# EAGLE board MRCS-Buckeroo V1_6-array (EAGLE 7.7.0)
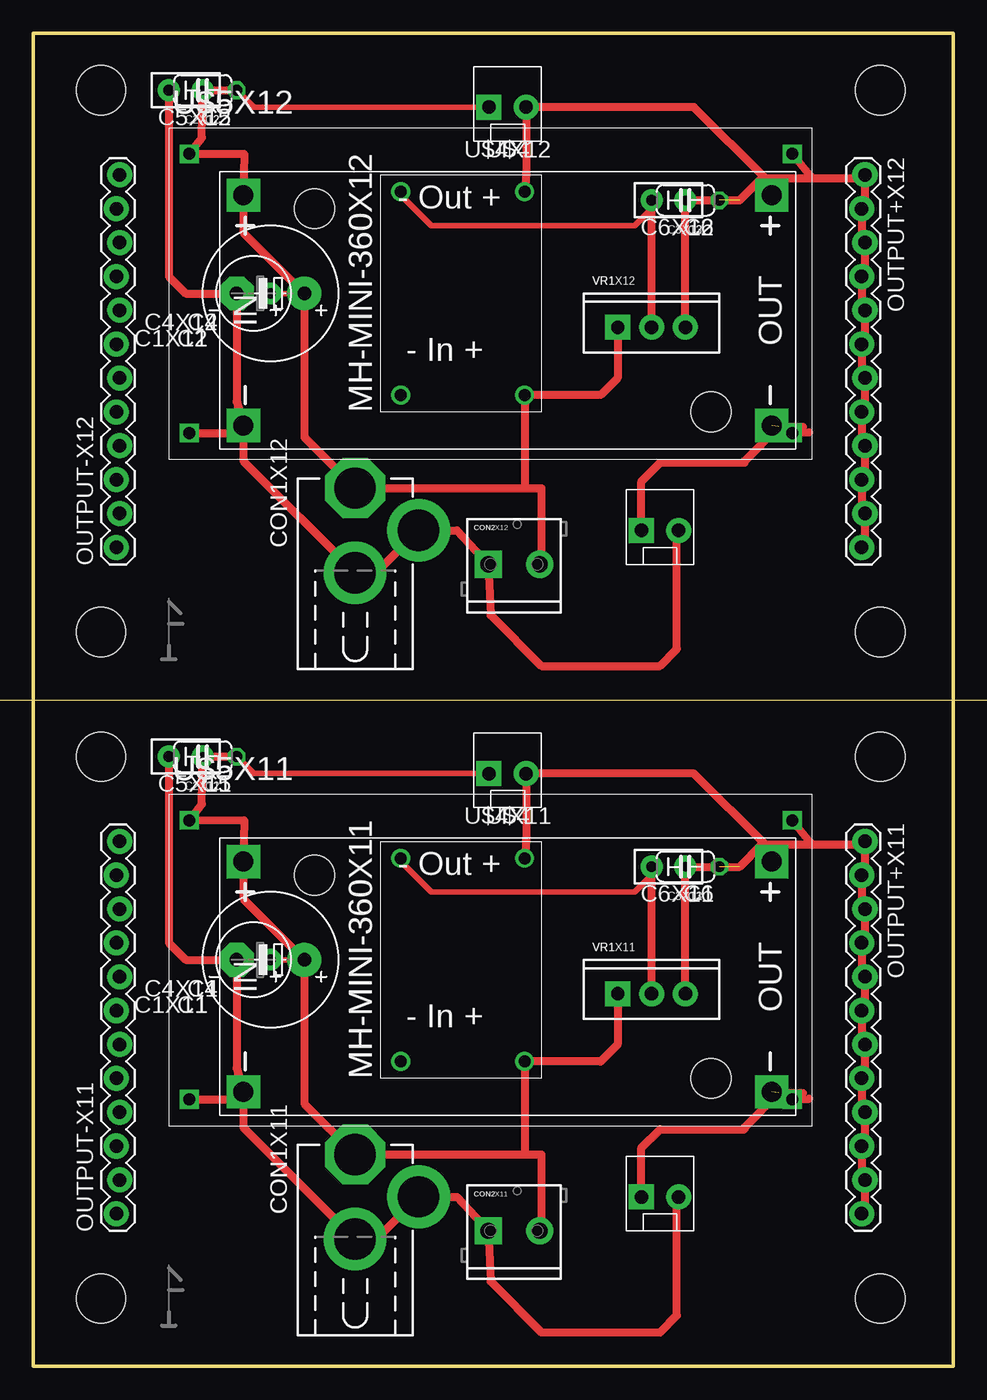
[diagram p0: board, top side]
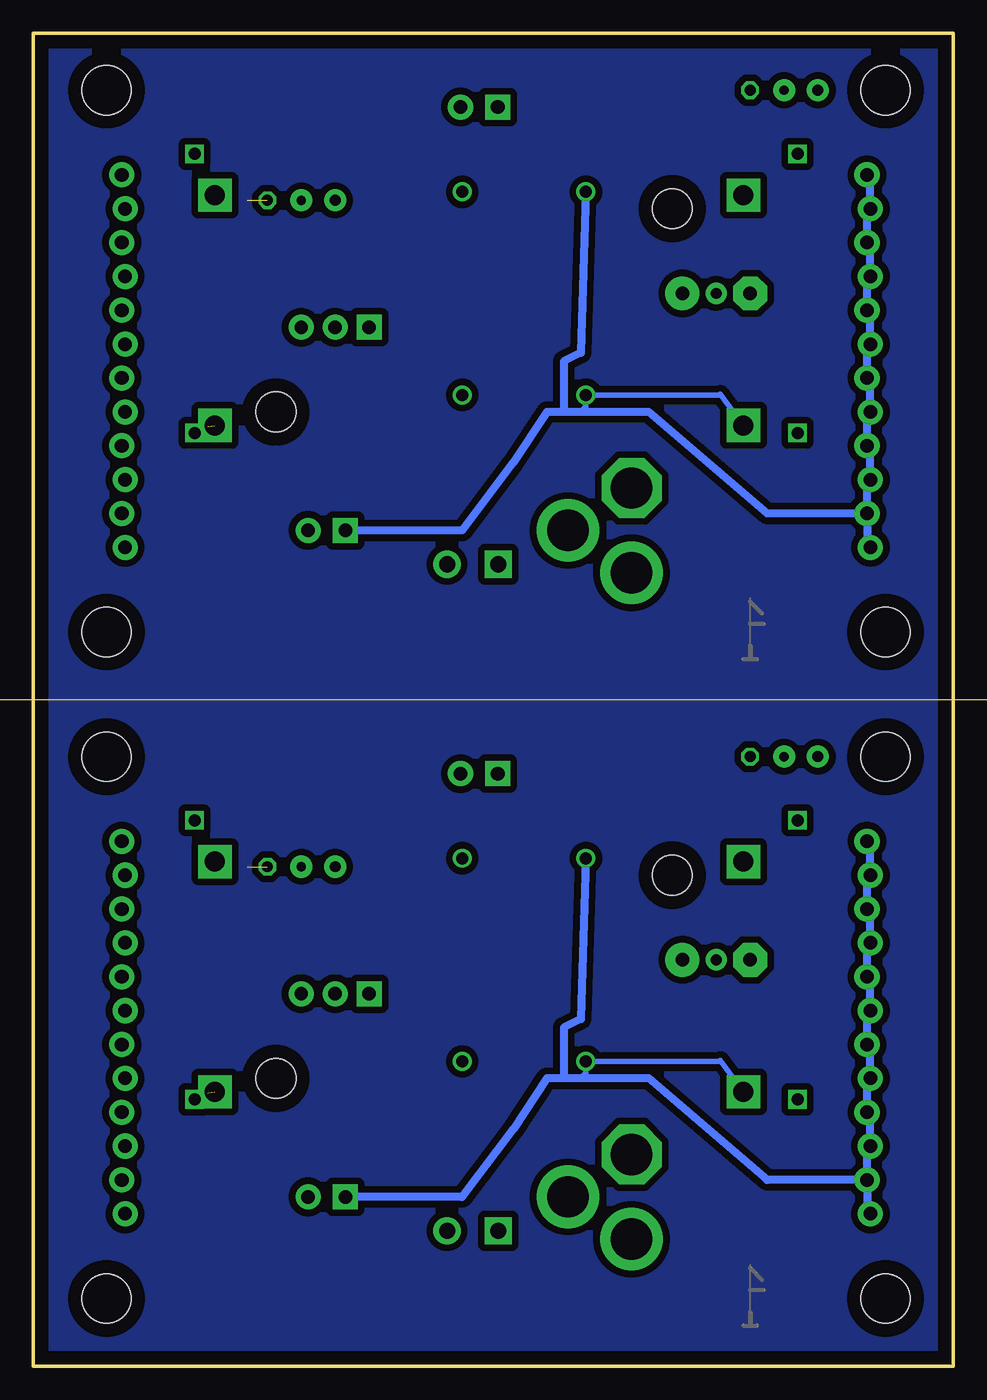
[diagram p1: board, bottom side, seen from below]

Size 68.99 x 99.97 mm. Coordinates in mm from the lower left corner, seen from the top.
Outline: 0,0 68.99,0 68.99,99.97 0,99.97 0,0
Copper layers (1*16): Top 0.035mm / dielectric 1.5mm / Bottom 0.035mm
Design rules "default": minimum track width 10mil, minimum drill 24mil, track to track 8mil, track to pad 8mil, pad to pad 8mil, via to via 8mil, smd to smd 8mil, copper to edge 40mil, drill to drill 8mil, minimum pad ring 10mil, minimum via ring 8mil, stop-mask expansion 4mil, vias tented up to drill 0mil, thermal gap 10mil
Holes 3.7 mm at 5.08,5.08 5.08,45.72 63.5,45.72 63.5,5.08 5.08,55.07 5.08,95.71 63.5,95.71 63.5,55.07
Milling: 1 lines

## Footprints (pad centres in the part's own frame; a part is rotated, then mirrored left to right if it is on the bottom)
E5-10.5 = drill 1.016 pad 2.54: + -2.54,0 | drill 1.016 pad 2.54 octagon: - 2.54,0
C-PTH-0.100 = drill 0.7 pad 1.651: 1 -1.27,0; 2 1.27,0
E2.5-6 = drill 0.813 pad 1.6: + -1.27,0 | drill 0.813 pad 1.6 octagon: - 1.27,0
C050-024X044 = drill 0.813 octagon: 1 -2.54,0; 2 2.54,0
DCJ0202 = drill 3.1 pad 4.5 octagon: 1 0,3.175 | drill 3.1 pad 4.7: 2 4.763,0; 3 0,-3.175
SCREWTERMINAL-3.5MM-2_LOCK = drill 1.2 pad 2.032 square: 1 -0.178,0 | drill 1.2 pad 2.032: 2 3.678,0
MOLEX-1X2_LOCK = drill 1.016 pad 1.88 square: 1 -0.127,0 | drill 1.016 pad 1.88: 2 2.667,0
MH-MINI-360 = drill 0.9: IN- -7.62,4.826; INN+ -7.62,-4.445; OUT- 7.62,4.826; OUTT+ 7.62,-4.445
1X12_LOCK = drill 1.016 pad 1.88: 1 0,0.127; 2 2.54,-0.127; 3 5.08,0.127; 4 7.62,-0.127; 5 10.16,0.127; 6 12.7,-0.127; 7 15.24,0.127; 8 17.78,-0.127; 9 20.32,0.127; 10 22.86,-0.127; 11 25.4,0.127; 12 27.94,-0.127
DC-DC-STEP-DOWN-LM2596 = drill 1.5 pad 2.5 square: IN+ -19.812,8.636; IN- -19.812,-8.636; OUT+ 19.812,8.636; OUT- 19.812,-8.636 | hole 3: -14.478,7.62; 15.24,-7.62
XL6009_BOARD = drill 0.9 square: IN+ -22.606,10.465; IN- -22.606,-10.465; OUT+ 22.606,10.465; OUT- 22.606,-10.465
TO-220-RA = drill 1 pad 1.88: GND 0,0; OUT 2.54,0 | drill 1 pad 1.88 square: IN -2.54,0

## Placement (x,y rotation side)
C1X11  150uF@50  [E5-10.5]  17.78,30.48 180 top
C1X12  150uF@50  [E5-10.5]  17.78,80.47 180 top
C2X11  1.0uF@50  [C-PTH-0.100]  11.43,45.72 180 top
C2X12  1.0uF@50  [C-PTH-0.100]  11.43,95.71 180 top
C3X11  10uF@50  [C-PTH-0.100]  47.62,37.47 180 top
C3X12  10uF@50  [C-PTH-0.100]  47.62,87.45 180 top
C4X11  220uF @ 35V  [E2.5-6]  16.51,30.48 180 top
C4X12  220uF @ 35V  [E2.5-6]  16.51,80.47 180 top
C5X11  1.0 UF@ 50V  [C050-024X044]  12.7,45.72 180 top
C5X12  1.0 UF@ 50V  [C050-024X044]  12.7,95.71 180 top
C6X11  10uF @ 50V  [C050-024X044]  48.9,37.47 180 top
C6X12  10uF @ 50V  [C050-024X044]  48.9,87.45 180 top
CON1X11  DC PWR  [DCJ0202]  24.13,12.7 0 top
CON1X12  DC PWR  [DCJ0202]  24.13,62.69 0 top
CON2X11  DC PWR  [SCREWTERMINAL-3.5MM-2_LOCK]  34.29,10.16 0 top
CON2X12  DC PWR  [SCREWTERMINAL-3.5MM-2_LOCK]  34.29,60.15 0 top
CON3X11  output bypass  [MOLEX-1X2_LOCK]  34.29,44.45 0 top
CON3X12  output bypass  [MOLEX-1X2_LOCK]  34.29,94.44 0 top
CON4X11  GND BYPASS  [MOLEX-1X2_LOCK]  45.72,12.7 0 top
CON4X12  GND BYPASS  [MOLEX-1X2_LOCK]  45.72,62.69 0 top
MH-MINI-360X11  MH-MINI-360  [MH-MINI-360]  32.38,30.48 90 top
MH-MINI-360X12  MH-MINI-360  [MH-MINI-360]  32.38,80.47 90 top
OUTPUT+X11  OUTPUT+  [1X12_LOCK]  62.23,39.37 270 top
OUTPUT+X12  OUTPUT+  [1X12_LOCK]  62.23,89.36 270 top
OUTPUT-X11  OUTPUT-  [1X12_LOCK]  6.35,11.43 90 top
OUTPUT-X12  OUTPUT-  [1X12_LOCK]  6.35,61.42 90 top
U$1X11  [CA-PROP65WARNING]  40.64,35.56 0 top
U$1X12  [CA-PROP65WARNING]  40.64,85.55 0 top
U$2X11  [MRCSLOGOTOP]  8.89,2.54 0 top
U$2X12  [MRCSLOGOTOP]  8.89,52.53 0 top
U$3X11  [MRCSLOGOBTM]  8.89,2.54 0 top
U$3X12  [MRCSLOGOBTM]  8.89,52.53 0 top
U$4X11  DC-DC-STEP-DOWN-LM2596  [DC-DC-STEP-DOWN-LM2596]  35.56,29.21 0 top
U$4X12  DC-DC-STEP-DOWN-LM2596  [DC-DC-STEP-DOWN-LM2596]  35.56,79.2 0 top
U$5X11  XL6009BOARD  [XL6009_BOARD]  34.29,30.48 0 top
U$5X12  XL6009BOARD  [XL6009_BOARD]  34.29,80.47 0 top
VR1X11  780X  [TO-220-RA]  46.35,27.94 0 top
VR1X12  780X  [TO-220-RA]  46.35,77.93 0 top

## Library data of the parts
C1X11 C1X12 C2X11 C2X12 C3X11 C3X12 C4X11 C4X12 C5X11 C5X12 C6X11 C6X12 CON1X11 CON1X12 CON2X11 CON2X12 CON3X11 CON3X12 CON4X11 CON4X12 OUTPUT+X11 OUTPUT+X12 OUTPUT-X11 OUTPUT-X12 VR1X11 VR1X12 = SPCoast
MH-MINI-360X11 MH-MINI-360X12 U$5X11 U$5X12 = MRCS
U$1X11 U$1X12 = MRCS-prop65warningBtm
U$2X11 U$2X12 = MRCSLogoTop
U$3X11 U$3X12 = MRCSLogoBtm
U$4X11 U$4X12 = diy-modules

## Nets
GNDX11: C1X11.- C2X11.2 C3X11.2 C4X11.- C5X11.2 C6X11.2 CON1X11.2 CON1X11.3 CON2X11.1 CON4X11.1 CON4X11.2 MH-MINI-360X11.IN- MH-MINI-360X11.OUT- OUTPUT-X11.1 OUTPUT-X11.2 OUTPUT-X11.3 OUTPUT-X11.4 OUTPUT-X11.5 OUTPUT-X11.6 OUTPUT-X11.7 OUTPUT-X11.8 OUTPUT-X11.9 OUTPUT-X11.10 OUTPUT-X11.11 OUTPUT-X11.12 U$4X11.IN- U$4X11.OUT- U$5X11.IN- U$5X11.OUT- VR1X11.GND
GNDX12: C1X12.- C2X12.2 C3X12.2 C4X12.- C5X12.2 C6X12.2 CON1X12.2 CON1X12.3 CON2X12.1 CON4X12.1 CON4X12.2 MH-MINI-360X12.IN- MH-MINI-360X12.OUT- OUTPUT-X12.1 OUTPUT-X12.2 OUTPUT-X12.3 OUTPUT-X12.4 OUTPUT-X12.5 OUTPUT-X12.6 OUTPUT-X12.7 OUTPUT-X12.8 OUTPUT-X12.9 OUTPUT-X12.10 OUTPUT-X12.11 OUTPUT-X12.12 U$4X12.IN- U$4X12.OUT- U$5X12.IN- U$5X12.OUT- VR1X12.GND
INPUT+X11: C1X11.+ C2X11.1 C4X11.+ C5X11.1 CON1X11.1 CON2X11.2 CON3X11.1 MH-MINI-360X11.INN+ U$4X11.IN+ U$5X11.IN+ VR1X11.IN
INPUT+X12: C1X12.+ C2X12.1 C4X12.+ C5X12.1 CON1X12.1 CON2X12.2 CON3X12.1 MH-MINI-360X12.INN+ U$4X12.IN+ U$5X12.IN+ VR1X12.IN
OUTPUT+X11: C3X11.1 C6X11.1 CON3X11.2 MH-MINI-360X11.OUTT+ OUTPUT+X11.1 OUTPUT+X11.2 OUTPUT+X11.3 OUTPUT+X11.4 OUTPUT+X11.5 OUTPUT+X11.6 OUTPUT+X11.7 OUTPUT+X11.8 OUTPUT+X11.9 OUTPUT+X11.10 OUTPUT+X11.11 OUTPUT+X11.12 U$4X11.OUT+ U$5X11.OUT+ VR1X11.OUT
OUTPUT+X12: C3X12.1 C6X12.1 CON3X12.2 MH-MINI-360X12.OUTT+ OUTPUT+X12.1 OUTPUT+X12.2 OUTPUT+X12.3 OUTPUT+X12.4 OUTPUT+X12.5 OUTPUT+X12.6 OUTPUT+X12.7 OUTPUT+X12.8 OUTPUT+X12.9 OUTPUT+X12.10 OUTPUT+X12.11 OUTPUT+X12.12 U$4X12.OUT+ U$5X12.OUT+ VR1X12.OUT

## Tracks (layer width: path | path; a pad name or v marks a point on that pad's centre or on a via)
GNDX11  (1 unrouted)
  Top 0.406: C4X11.- 15.24,21.59 | MH-MINI-360X11.OUT- 27.56,37.85 29.84,35.56 45.09,35.56 46.35,36.83
  Top 0.61: 15.75,20.32 U$4X11.IN- 15.24,22.35 C4X11.- 11.43,30.48 10.16,31.75 C5X11.2 | 15.75,20.32 15.75,17.91 CON1X11.3 25.72,9.53 CON1X11.2 31.75,12.7 CON2X11.1 34.29,6.35 38.1,2.54 46.99,2.54 48.26,3.81 48.26,12.57 CON4X11.2 | U$5X11.IN- 15.44,20.02 15.75,20.32 | CON4X11.1 45.59,16.38 46.99,17.78 53.34,17.78 53.34,17.92 55.91,20.48 57.7,20.48 U$5X11.OUT- 58.17,20.07 | VR1X11.GND 46.35,36.83 C3X11.2
  Bottom 0.406: U$4X11.IN- 17.46,22.92 17.46,22.86 MH-MINI-360X11.IN- 27.56,21.97 27.94,21.59
  Bottom 0.61: OUTPUT-X11.2 13.97,13.97 22.86,21.59 27.94,21.59 29.21,21.59 | 29.21,21.59 30.48,21.59 33.02,17.78 36.83,12.7 CON4X11.1 | MH-MINI-360X11.OUT- 27.94,26.04 29.21,25.4 29.21,21.59 | OUTPUT-X11.2 6.48,11.68 OUTPUT-X11.1 | OUTPUT-X11.2 6.48,16.26 OUTPUT-X11.3 6.22,18.8 OUTPUT-X11.4 6.48,21.34 OUTPUT-X11.5 6.22,23.88 OUTPUT-X11.6 6.48,26.42 OUTPUT-X11.7 6.22,28.96 OUTPUT-X11.8 6.48,31.5 OUTPUT-X11.9 6.22,34.04 OUTPUT-X11.10 6.48,36.58 OUTPUT-X11.11 6.22,39.12 OUTPUT-X11.12
GNDX12  (1 unrouted)
  Top 0.406: C4X12.- 15.24,71.58 | MH-MINI-360X12.OUT- 27.56,87.83 29.84,85.55 45.09,85.55 46.35,86.82
  Top 0.61: 15.75,70.31 U$4X12.IN- 15.24,72.34 C4X12.- 11.43,80.47 10.16,81.74 C5X12.2 | 15.75,70.31 15.75,67.89 CON1X12.3 25.72,59.51 CON1X12.2 31.75,62.69 CON2X12.1 34.29,56.34 38.1,52.53 46.99,52.53 48.26,53.8 48.26,62.56 CON4X12.2 | U$5X12.IN- 15.44,70 15.75,70.31 | CON4X12.1 45.59,66.37 46.99,67.77 53.34,67.77 53.34,67.9 55.91,70.47 57.7,70.47 U$5X12.OUT- 58.17,70.05 | VR1X12.GND 46.35,86.82 C3X12.2
  Bottom 0.406: U$4X12.IN- 17.46,72.91 17.46,72.85 MH-MINI-360X12.IN- 27.56,71.96 27.94,71.58
  Bottom 0.61: OUTPUT-X12.2 13.97,63.96 22.86,71.58 27.94,71.58 29.21,71.58 | 29.21,71.58 30.48,71.58 33.02,67.77 36.83,62.69 CON4X12.1 | MH-MINI-360X12.OUT- 27.94,76.02 29.21,75.39 29.21,71.58 | OUTPUT-X12.2 6.48,61.67 OUTPUT-X12.1 | OUTPUT-X12.2 6.48,66.24 OUTPUT-X12.3 6.22,68.78 OUTPUT-X12.4 6.48,71.32 OUTPUT-X12.5 6.22,73.86 OUTPUT-X12.6 6.48,76.4 OUTPUT-X12.7 6.22,78.94 OUTPUT-X12.8 6.48,81.48 OUTPUT-X12.9 6.22,84.02 OUTPUT-X12.10 6.48,86.56 OUTPUT-X12.11 6.22,89.1 OUTPUT-X12.12
INPUT+X11
  Top 0.406: C4X11.+ C1X11.+ | CON3X11.1 16.51,44.45 C5X11.1
  Top 0.61: C5X11.1 C2X11.1 12.64,42.16 U$5X11.IN+ 15.81,40.96 U$4X11.IN+ 15.75,35.05 C1X11.+ 20.32,19.68 CON1X11.1 | VR1X11.IN 43.81,24.13 42.55,22.86 MH-MINI-360X11.INN+ 36.83,15.88 | CON1X11.1 24.77,15.24 | CON1X11.1 36.83,15.88 | 36.83,15.88 38.1,15.88 38.1,10.29 CON2X11.2
INPUT+X12
  Top 0.406: C4X12.+ C1X12.+ | CON3X12.1 16.51,94.44 C5X12.1
  Top 0.61: C5X12.1 C2X12.1 12.64,92.15 U$5X12.IN+ 15.81,90.94 U$4X12.IN+ 15.75,85.04 C1X12.+ 20.32,69.67 CON1X12.1 | VR1X12.IN 43.81,74.12 42.55,72.85 MH-MINI-360X12.INN+ 36.83,65.86 | CON1X12.1 24.77,65.23 | CON1X12.1 36.83,65.86 | 36.83,65.86 38.1,65.86 38.1,60.28 CON2X12.2
OUTOUT-X11
  pour Bottom (isolate 0.508): 0,0 68.58,0 68.58,49.53 0,49.53
OUTOUT-X12
  pour Bottom (isolate 0.508): 0,49.99 68.58,49.99 68.58,99.52 0,99.52
OUTPUT+X11  (1 unrouted)
  Top 0.61: 54.61,39.12 54.86,39.12 | 54.86,39.12 49.53,44.45 CON3X11.2 | CON3X11.2 36.83,44.45 | OUTPUT+X11.12 62.36,11.68 OUTPUT+X11.11 62.1,14.22 OUTPUT+X11.10 62.36,16.76 OUTPUT+X11.9 62.1,19.3 OUTPUT+X11.8 62.36,21.84 OUTPUT+X11.7 62.1,24.38 OUTPUT+X11.6 62.36,26.92 OUTPUT+X11.5 62.1,29.46 OUTPUT+X11.4 62.36,32 OUTPUT+X11.3 62.1,34.54 OUTPUT+X11.2 62.36,37.08 OUTPUT+X11.1 62.1,39.12 58.42,39.12 | U$4X11.OUT+ 54.61,39.12 | 54.86,39.12 58.42,39.12 | CON3X11.2 36.96,39.5 MH-MINI-360X11.OUTT+ | VR1X11.OUT C3X11.1 52.96,37.47 54.61,39.12 | U$5X11.OUT+ 58.17,39.37 58.42,39.12
OUTPUT+X12  (1 unrouted)
  Top 0.61: 54.61,89.1 54.86,89.1 | 54.86,89.1 49.53,94.44 CON3X12.2 | CON3X12.2 36.83,94.44 | OUTPUT+X12.12 62.36,61.67 OUTPUT+X12.11 62.1,64.21 OUTPUT+X12.10 62.36,66.75 OUTPUT+X12.9 62.1,69.29 OUTPUT+X12.8 62.36,71.83 OUTPUT+X12.7 62.1,74.37 OUTPUT+X12.6 62.36,76.91 OUTPUT+X12.5 62.1,79.45 OUTPUT+X12.4 62.36,81.99 OUTPUT+X12.3 62.1,84.53 OUTPUT+X12.2 62.36,87.07 OUTPUT+X12.1 62.1,89.1 58.42,89.1 | U$4X12.OUT+ 54.61,89.1 | 54.86,89.1 58.42,89.1 | CON3X12.2 36.96,89.48 MH-MINI-360X12.OUTT+ | VR1X12.OUT C3X12.1 52.96,87.45 54.61,89.1 | U$5X12.OUT+ 58.17,89.36 58.42,89.1

## Text on the board
tPlace: - Out + | - In + | - Out + | - In +
Milling: V-Score
tDocu: U$5 | C2 | C5 | + V Jumper | C3 | C6 | VR1 | C4 | Output - | C1 | Output + | MH-MINI-360 | CON2 | CON1 | - V / (GND) / JUMP | "Buckeroo V1.6" / Seth Neumann / 20230226 | GND | IN - + | U$5 | C2 | C5 | + V Jumper | C3 | C6 | VR1 | C4 | Output - | C1 | Output + | MH-MINI-360 | CON2 | CON1 | - V / (GND) / JUMP | "Buckeroo V1.6" / Seth Neumann / 20230226 | GND | IN - +
_tNames: U$5 | C2 | C5 | U$4 | C3 | C6 | VR1 | C4 | C1 | MH-MINI-360 | CON2 | CON1 | U$5 | C2 | C5 | U$4 | C3 | C6 | VR1 | C4 | C1 | MH-MINI-360 | CON2 | CON1